# EAGLE board sound detect (EAGLE 7.5.0)
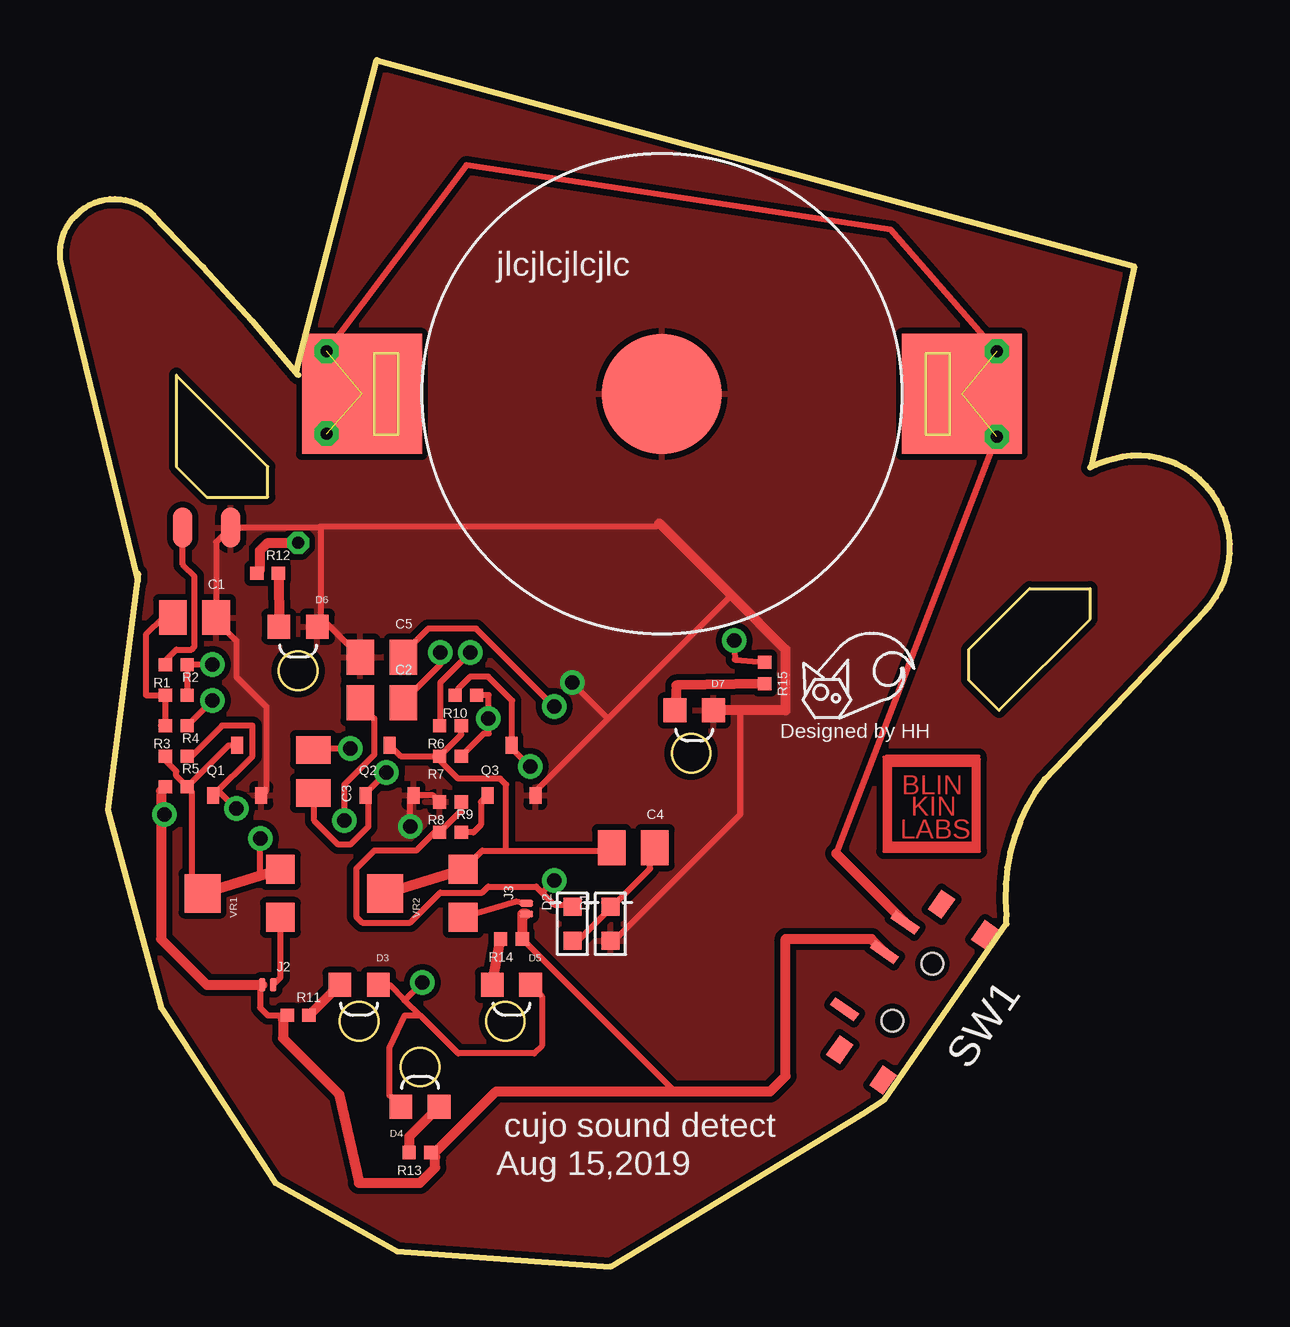
[diagram p0: board, top side]
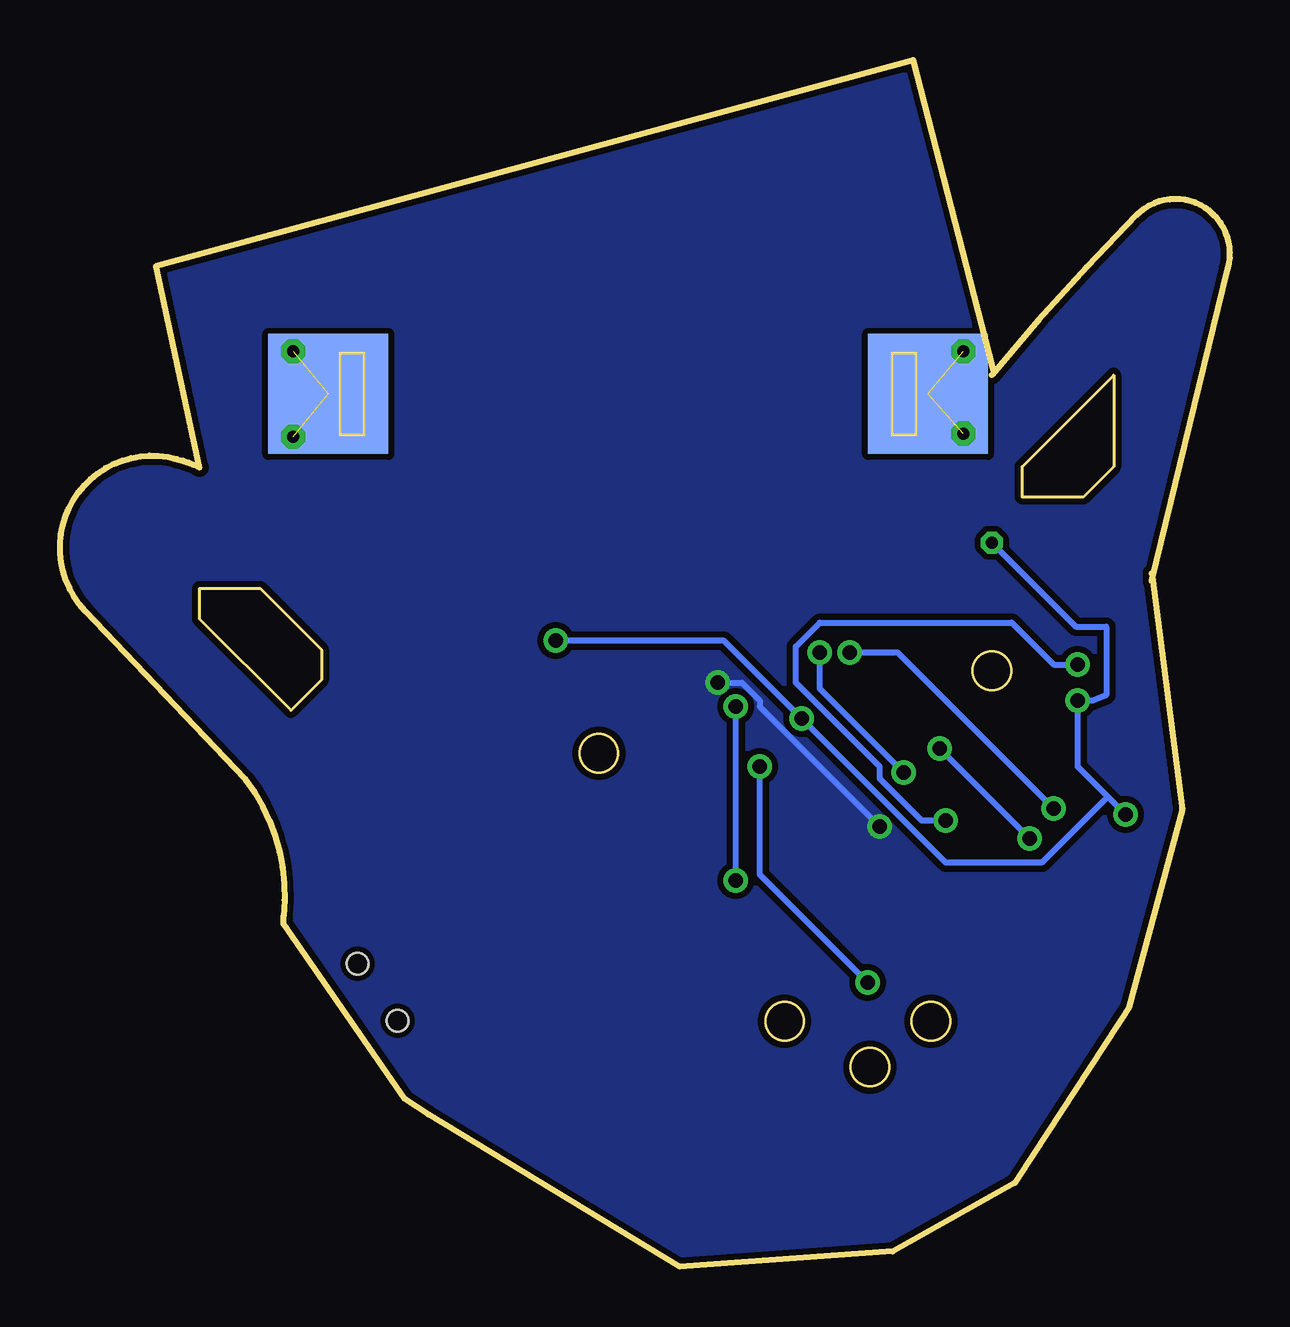
[diagram p1: board, bottom side, seen from below]

Size 48.77 x 50.28 mm. Coordinates in mm from the lower left corner, seen from the top.
Outline: 3.26,28.58 0.08,41.59 arc-151 3.89,43.81 arc-5 9.93,37.15
Outline: 42.95,33.3 arc-15 43.9,33.66 arc-149 47.71,27.31 41.04,20.32 arc44 39.46,14.61 39.46,14.29 34.37,6.98 33.42,6.35 22.95,0 14.05,0.63 8.98,3.49 4.21,10.79 1.99,19.05 3.26,28.89
Outline: 9.87,37.37 13.2,50.28 44.77,41.68 42.99,33.36
Outline: 4.85,37.15 4.85,33.34 6.12,32.07 8.66,32.07 8.66,33.34 4.85,37.15
Outline: 37.87,25.72 37.87,24.45 39.14,23.18 42.95,26.99 42.95,28.26 40.41,28.26 37.87,25.72
Outline: circle at 9.93,24.83 radius 0.8
Outline: circle at 26.31,21.4 radius 0.8
Outline: circle at 12.47,10.22 radius 0.8
Outline: circle at 18.56,10.22 radius 0.8
Outline: circle at 15.01,8.32 radius 0.8
Copper layers (1*16): Top 0.035mm / dielectric 1.5mm / Bottom 0.035mm
Design rules "default *": minimum track width 4mil, minimum drill 24mil, track to track 4mil, track to pad 4mil, pad to pad 4mil, via to via 4mil, smd to smd 4mil, copper to edge 8mil, drill to drill 8mil, minimum pad ring 10mil, minimum via ring 8mil, stop-mask expansion 4mil, vias tented up to drill 27mil, thermal gap 10mil

## Footprints (pad centres in the part's own frame; a part is rotated, then mirrored left to right if it is on the bottom)
CAP-0805C-LEVELB = smd 1.15 x 1.45: P$1 -0.9,0; P$2 0.9,0
SOD523 = smd 0.75 x 0.75: A 0.71,0; K -0.71,0
SMD-0603-LED-SIDE = smd 0.95 x 1: A 0.8,0; C -0.8,0
SMD-2P-2.0 = smd 0.813 x 1.676: P$1 -1,0; P$2 1,0
SHORTPAD = smd 0.275 x 0.55: P$1 -0.225,0; P$2 0.225,0
CR2032-SMD = smd 5 x 5: + -12.5,0; ++1 12.5,0; - 0,0 | smd 5 x 5 bottom: +1 -12.5,0; ++ 12.5,0 | drill 0.5 octagon: P$1 -13.97,1.778; P$2 -13.97,-1.651; P$3 13.97,1.778; P$4 13.97,-1.778
SOT23-3 = smd 0.5 x 0.7: P$1 -1,-1; P$2 1,-1; P$3 0,1.089
RES-0402R-REFLOW = smd 0.55 x 0.55: P$1 -0.45,0; P$2 0.45,0
SLIDE-SW-MSK-12C01-07 = smd 1.2 x 0.4: COM 1.905,-0.7; POS1 1.905,2.2; POS2 1.905,-2.2 | smd 0.7 x 1: SHIELD-1 -1.1,3.7; SHIELD-2 1.1,3.7; SHIELD-3 -1.1,-3.7; SHIELD-4 1.1,-3.7 | hole 0.9: 0,1.45; 0,-1.45
SMD-3638 = smd 1.2 x 1.2: P$1 1,-1.8; P$3 -1,-1.8 | smd 1.6 x 1.5: P$2 0,1.45

## Placement (x,y rotation side)
C1  10uF,0805  [CAP-0805C-LEVELB]  5.61,27.05 180 top
C2  1uF,0805  [CAP-0805C-LEVELB]  13.42,23.49 180 top
C3  1uF,0805  [CAP-0805C-LEVELB]  10.56,20.64 90 top
C4  1uF,0805  [CAP-0805C-LEVELB]  23.9,17.46 180 top
C5  1uF,0805  [CAP-0805C-LEVELB]  13.42,25.4 180 top
D1  1N4148-SOD523  [SOD523]  22.95,14.29 270 top
D2  1N4148-SOD523  [SOD523]  21.36,14.29 270 top
D3  0603side-white  [SMD-0603-LED-SIDE]  12.47,11.75 180 top
D4  0603side-white  [SMD-0603-LED-SIDE]  15.01,6.67 0 top
D5  0603side-white  [SMD-0603-LED-SIDE]  18.82,11.75 180 top
D6  0603SIDELED-uv  [SMD-0603-LED-SIDE]  9.93,26.67 180 top
D7  0603SIDELED-uv  [SMD-0603-LED-SIDE]  26.44,23.18 180 top
J1  SMD-PADS-2P  [SMD-2P-2.0]  6.12,30.8 180 top
J2  SHORT_PAD  [SHORTPAD]  8.66,11.75 180 top
J3  SHORT_PAD  [SHORTPAD]  19.45,14.92 270 top
J4  CR2032-THR  [CR2032-SMD]  25.09,36.37 0 top
Q1  MMBT2222A  [SOT23-3]  7.39,20.64 0 top
Q2  MMBT2222A  [SOT23-3]  13.74,20.64 0 top
Q3  MMBT2222A  [SOT23-3]  18.82,20.64 0 top
R1  1.2k,0402  [RES-0402R-REFLOW]  4.85,25.08 0 top
R2  1.2k,0402  [RES-0402R-REFLOW]  4.85,23.81 180 top
R3  100R,0402  [RES-0402R-REFLOW]  4.85,22.54 0 top
R4  1M,0402  [RES-0402R-REFLOW]  4.85,21.27 180 top
R5  51k,0402  [RES-0402R-REFLOW]  4.85,20 180 top
R6  1M,0402  [RES-0402R-REFLOW]  16.28,22.54 0 top
R7  51k,0402  [RES-0402R-REFLOW]  16.28,21.27 0 top
R8  100k,0402  [RES-0402R-REFLOW]  16.28,19.37 0 top
R9  39k,0402  [RES-0402R-REFLOW]  16.28,18.1 180 top
R10  1.2k,0402  [RES-0402R-REFLOW]  16.91,23.81 0 top
R11  510,0402  [RES-0402R-REFLOW]  9.93,10.48 180 top
R12  510,0402  [RES-0402R-REFLOW]  8.66,28.89 180 top
R13  510,0402  [RES-0402R-REFLOW]  15.01,4.76 0 top
R14  510,0402  [RES-0402R-REFLOW]  18.82,13.65 0 top
R15  510,0402  [RES-0402R-REFLOW]  29.37,24.74 90 top
SW1  SLIDE-MSK12C01-07  [SLIDE-SW-MSK-12C01-07]  35.53,11.44 145 top
U$2  [CUJO(5050)-MASK-BOT]  18.82,18.1 0 top
U$3  [CRAZYCAT(M)]  32.79,24.13 0 top
U$4  [LOGO(M-T)]  35.65,19.05 0 top
VR1  VG039NCHXTB204,200kVR  [SMD-3638]  7.39,15.56 90 top
VR2  VG039NCHXTB204,200kVR  [SMD-3638]  15.01,15.56 90 top

## Library data of the parts
C1-C5 D1-D7 J1-J4 Q1-Q3 R1-R15 SW1 U$2 VR1 VR2 = hh-led-2019
U$3 U$4 = drawing logo

## Nets
GND: C1.P$1 C5.P$2 D1.A D6.C D7.C J1.P$1 J4.- Q1.P$2 Q2.P$2 Q3.P$2 R8.P$1
MIC+: J1.P$2 R1.P$1
N$1: C2.P$2 R1.P$2 R2.P$1
N$2: C2.P$1 Q1.P$1 R4.P$1
N$3: C3.P$1 Q2.P$1 R6.P$1
N$4: C1.P$2 R2.P$2 R3.P$1
N$5: J4.+ J4.+1 J4.++ J4.++1 J4.P$1 J4.P$2 J4.P$3 J4.P$4 SW1.POS2
N$6: C4.P$1 D1.K D2.A
N$7: Q3.P$1 R9.P$1
N$8: C5.P$1 D2.K R8.P$2 R9.P$2
N$9: C4.P$2 Q2.P$3 R6.P$2 R7.P$1 VR2.P$1 VR2.P$2
N$10: D7.A R15.P$1
N$11: D3.C D4.C D5.C Q3.P$3 R10.P$1
N$12: D3.A R11.P$1
N$13: D6.A R12.P$1
N$14: D4.A R13.P$1
N$15: J2.P$1 VR1.P$3
N$16: D5.A R14.P$1
N$17: C3.P$2 Q1.P$3 R4.P$2 R5.P$1 VR1.P$1 VR1.P$2
N$18: J3.P$1 VR2.P$3
VCC: J2.P$2 J3.P$2 R3.P$2 R5.P$2 R7.P$2 R10.P$2 R11.P$2 R12.P$2 R13.P$2 R14.P$2 R15.P$2 SW1.COM

## Tracks (layer width: path | path; a pad name or v marks a point on that pad's centre or on a via)
GND  (via drill 0.61)
  Top 0.254: R8.P$1 15.56,19.64 Q2.P$2 14.6,19.59 v14.6,18.34 | 10.85,30.8 10.88,30.8 10.88,27.14 D6.C 10.85,27.09 12.35,25.59 C5.P$2 | 10.85,30.8 J1.P$1 6.51,30.19 C1.P$1 6.6,26.84 7.35,26.09 7.35,24.59 8.6,23.34 8.6,19.84 Q1.P$2 | 27.99,27.98 22.85,22.84 | 22.85,22.84 19.85,19.84 Q3.P$2 | 28.35,23.18 28.35,18.84 23.1,13.59 D1.A | 22.85,22.84 v21.35,24.34 | 10.85,30.8 10.85,30.84 24.85,30.84 24.99,30.98
  Top 0.406: 24.99,30.98 27.99,27.98 30.25,25.72 30.25,23.18 28.35,23.18 D7.C
  Bottom 0.254: v14.6,18.34 19.6,23.34 19.6,23.59 20.35,24.34 v21.35,24.34
  pour Top (isolate 0.254): 8.84,1.11 -2.1,18.64 -1.33,46.45 12.84,52.92 59.54,43.49 41.18,9.02 22.06,-4.03 9.22,-0.79
  pour Bottom (isolate 0.254): 7.23,2.92 -0.38,21.11 1.71,31.68 -1.43,46.54 7.8,45.3 9.51,41.3 13.31,53.49 46.98,43.49 44.7,34.92 50.88,31.59 43.75,19.78 41.85,12.73 27.2,0.25 12.93,-1.75 8.46,1.59
MIC+
  Top 0.254: R1.P$1 4.4,25.27 4.85,25.72 5.48,25.72 5.61,25.84 5.61,28.77 5.12,29.26 J1.P$2
N$1  (via drill 0.61)
  Top 0.254: R2.P$1 R1.P$2 5.35,25.09 v6.35,25.09 | v11.85,18.59 11.85,20.09 13.1,21.34 13.1,22.84 12.6,23.34 C2.P$2
  Bottom 0.254: v6.35,25.09 7.35,25.09 9.1,26.84 17.1,26.84 18.1,25.84 18.1,24.34 14.6,20.84 14.6,20.34 12.85,18.59 v11.85,18.59
N$2  (via drill 0.61)
  Top 0.254: R4.P$1 5.48,21.27 6.75,22.54 8.02,22.54 8.02,21.27 Q1.P$1 6.6,19.84 v7.35,19.09 | v15.85,25.59 15.85,25.09 14.35,23.59 C2.P$1
  Bottom 0.254: v15.85,25.59 13.85,25.59 v7.35,19.09
N$3  (via drill 0.61)
  Top 0.254: v17.1,25.59 15.85,24.34 15.85,22.59 R6.P$1 | v13.6,20.59 12.85,19.84 Q2.P$1 12.85,19.59 12.85,18.34 12.1,17.59 11.6,17.59 10.6,18.59 10.6,19.59 C3.P$1
  Bottom 0.254: v17.1,25.59 17.1,24.09 v13.6,20.59
N$4
  Top 0.254: R3.P$1 4.21,22.54 4.4,22.73 R2.P$2 3.58,23.81 3.58,26.35 4.28,27.05 C1.P$2
N$5  (6 unrouted)
  Top 0.254: 32.35,17.21 J4.P$4 | J4.P$3 34.64,43.21 16.94,45.9 J4.P$1
  Top 0.406: SW1.POS2 32.35,17.21
N$6
  Top 0.254: D2.A 21.6,13.59 22.85,14.84 D1.K 23.1,15.09 24.6,16.59 24.6,17.34 C4.P$1
N$7
  Top 0.254: Q3.P$1 17.55,19.37 17.55,18.42 17.23,18.1 R9.P$1
N$8  (via drill 0.61)
  Top 0.254: R8.P$2 16.73,19 R9.P$2 15.6,18.09 14.85,17.34 13.1,17.34 12.35,16.59 12.35,14.59 12.6,14.34 14.6,14.34 15.85,15.59 17.6,15.59 17.85,15.84 19.85,15.84 20.1,15.59 | 20.1,15.59 20.6,15.09 21.35,15.09 D2.K | v20.6,23.34 17.35,26.59 15.35,26.59 14.35,25.59 C5.P$1 | 20.1,15.59 v20.6,16.09
  Bottom 0.254: v20.6,16.09 v20.6,23.34
N$9
  Top 0.254: Q2.P$3 14.19,21.27 R7.P$1 | R7.P$1 16.73,22.17 R6.P$2 | 18.6,17.34 17.6,17.34 16.85,16.59 VR2.P$1 | 18.6,17.34 22.85,17.34 C4.P$2 | 18.6,17.34 18.6,20.09 18.35,20.34 16.6,20.34 15.85,21.09 R7.P$1
  Top 0.406: VR2.P$2 VR2.P$1
N$10
  Top 0.406: R15.P$1 25.69,24.22 D7.A
N$11  (via drill 0.61)
  Top 0.254: D5.C 20.09,11.28 20.09,9.21 19.77,8.89 16.6,8.89 15.01,10.48 | 15.01,10.48 14.37,11.11 | 14.37,11.11 13.74,11.75 D3.C | D4.C 13.74,7.14 13.74,9.14 14.37,10.48 15.01,10.48 | R10.P$1 16.6,23.84 16.6,24.09 17.1,24.59 17.85,24.59 18.85,23.59 18.85,21.84 Q3.P$3 18.85,21.59 v19.6,20.84 | 14.37,11.11 v15.1,11.84 | 14.35,11.09 14.37,11.11
  Bottom 0.254: v19.6,20.84 19.6,16.34 v15.1,11.84
N$12
  Top 0.406: R11.P$1 11.65,11.75 D3.A
N$13
  Top 0.406: R12.P$1 D6.A
N$14
  Top 0.406: D4.A 14.56,5.42 R13.P$1
N$15
  Top 0.254: J2.P$1 9.19,12.05 VR1.P$3
N$16
  Top 0.406: D5.A R14.P$1
N$17  (via drill 0.61)
  Top 0.254: R5.P$1 4.85,20.45 4.85,20.64 4.4,21.09 R4.P$2 | R5.P$1 5.48,19.82 5.48,16.19 5.94,15.74 VR1.P$2 | R5.P$1 7.02,21.73 Q1.P$3 | v12.1,21.59 10.6,21.59 C3.P$2 | v8.35,17.84 8.35,16.34 8.36,16.3
  Top 0.406: VR1.P$2 8.36,16.3 VR1.P$1
  Bottom 0.254: v8.35,17.84 v12.1,21.59
N$18
  Top 0.254: J3.P$1 19.03,15.22 16.85,14.59 VR2.P$3
VCC  (via drill 0.5, 0.61)
  Top 0.254: J2.P$2 8.34,11.66 8.34,10.79 8.66,10.48 R11.P$2 | R7.P$2 17.68,22.22 17.87,22.22 17.87,22.84 | 17.87,22.84 17.87,23.81 R10.P$2 | v6.35,23.59 5.35,22.59 R3.P$2 | v4.35,18.84 4.21,18.84 | R14.P$2 19.35,13.59 25.6,7.34 25.6,7.3 | v28.1,26.09 28.13,25.29 R15.P$2 | v17.85,22.84 17.87,22.84
  Top 0.406: SW1.COM 33.82,13.65 30.25,13.65 30.25,7.94 29.61,7.3 25.6,7.3 18.18,7.3 15.64,4.76 R13.P$2 15.64,4.58 15.64,4.13 15.01,3.49 12.47,3.49 11.64,7.17 11.65,7.17 9.29,9.53 9.29,10.29 R11.P$2 | R5.P$2 4.21,19.82 4.21,18.84 4.21,13.65 6.12,11.75 J2.P$2 | R12.P$2 8.34,29.03 8.34,29.85 8.66,30.16 v9.93,30.16 | J3.P$2 19.27,14.7 R14.P$2
  Bottom 0.254: v4.35,18.84 5.1,19.59 | 5.1,19.59 6.35,20.84 v6.35,23.59 5.71,23.59 5.17,23.81 5.17,26.67 6.43,26.67 v9.93,30.16 | v28.1,26.09 21.1,26.09 v17.85,22.84 11.85,16.84 7.85,16.84 5.1,19.59

## Text on the board
tPlace: jlcjlcjlcjlc | cujo sound detect | Aug 15,2019